# EAGLE board ArduinoRadioV3 (EAGLE 9.5.2)
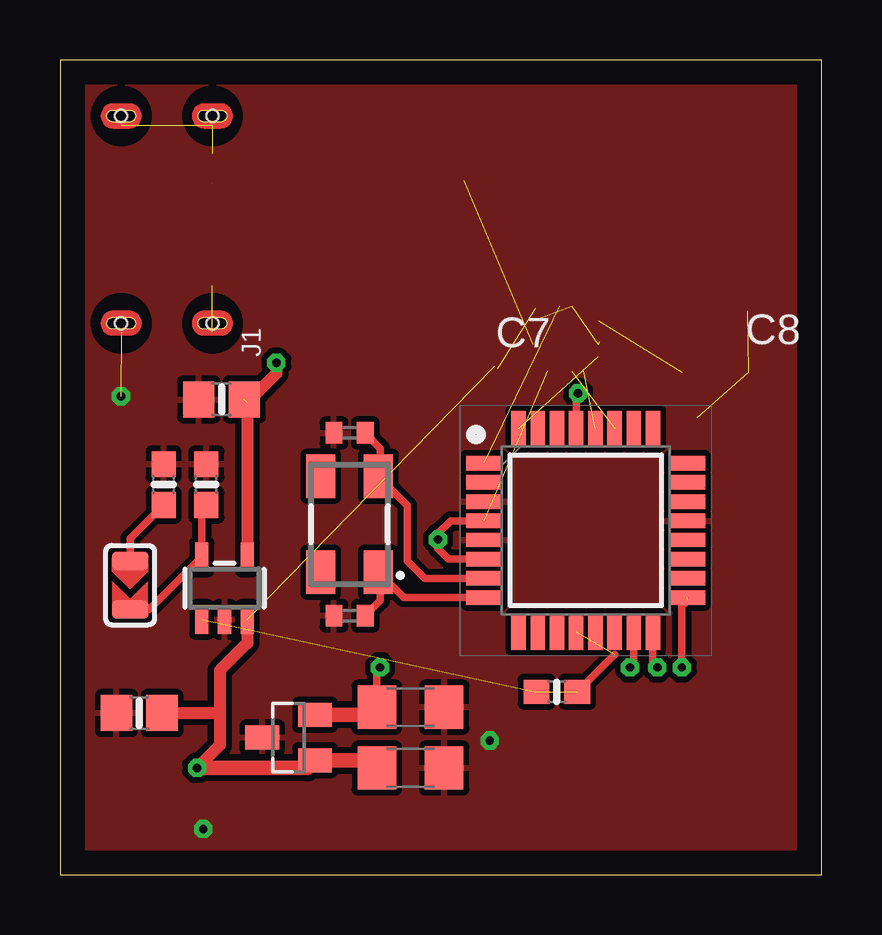
[diagram p0: board, top side]
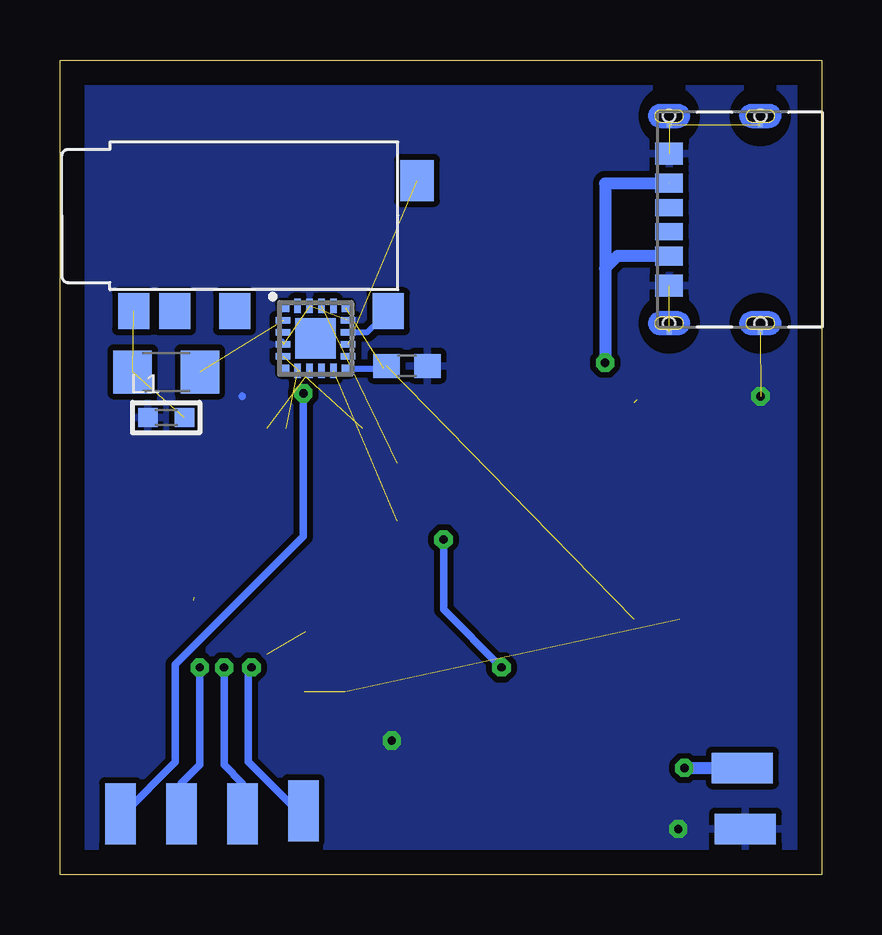
[diagram p1: board, bottom side, seen from below]

Size 31.73 x 33.96 mm. Coordinates in mm from the lower left corner, seen from the top.
Outline: 0,0 31.73,0 31.73,33.96 0,33.96 0,0
Copper layers (1*16): Top 0.035mm / dielectric 1.5mm / Bottom 0.035mm
Design rules "default": minimum track width 6mil, minimum drill 0.35mm, track to track 6mil, track to pad 6mil, pad to pad 6mil, via to via 6mil, smd to smd 6mil, copper to edge 40mil, drill to drill 6mil, minimum pad ring 10mil, minimum via ring 8mil, stop-mask expansion 4mil, vias tented up to drill 0mil, thermal gap 10mil

## Footprints (pad centres in the part's own frame; a part is rotated, then mirrored left to right if it is on the bottom)
C0402 = smd 0.7 x 0.9: 1 -0.65,0; 2 0.65,0
C1206 = smd 1.6 x 1.8: 1 -1.4,0; 2 1.4,0
0805-NO@1 = smd 1.3 x 1.5: 1 -0.95,0; 2 0.95,0
C0603 = smd 1.1 x 1: 1 -0.85,0; 2 0.85,0
QFP80P900X900X120-32N = smd 1.475 x 0.6: 1 -4.238,2.8; 2 -4.238,2; 3 -4.238,1.2; 4 -4.238,0.4; 5 -4.238,-0.4; 6 -4.238,-1.2; 7 -4.238,-2; 8 -4.238,-2.8; 17 4.238,-2.8; 18 4.238,-2; 19 4.238,-1.2; 20 4.238,-0.4; 21 4.238,0.4; 22 4.238,1.2; 23 4.238,2; 24 4.238,2.8 | smd 0.6 x 1.475: 9 -2.8,-4.238; 10 -2,-4.238; 11 -1.2,-4.238; 12 -0.4,-4.238; 13 0.4,-4.238; 14 1.2,-4.238; 15 2,-4.238; 16 2.8,-4.238; 25 2.8,4.238; 26 2,4.238; 27 1.2,4.238; 28 0.4,4.238; 29 -0.4,4.238; 30 -1.2,4.238; 31 -2,4.238; 32 -2.8,4.238
SOT23 = smd 1 x 1.4: 1 -0.95,-1.1; 2 0.95,-1.1; 3 0,1.1
SI4703C19GM = smd 0.34 x 0.34: 1 -1.265,1.265; 6 -1.265,-1.265; 11 1.265,-1.265; 16 1.265,1.265 | smd 0.61 x 0.28: 2 -1.355,0.75; 3 -1.355,0.25; 4 -1.355,-0.25; 5 -1.355,-0.75; 12 1.355,-0.75; 13 1.355,-0.25; 14 1.355,0.25; 15 1.355,0.75 | smd 0.28 x 0.61: 7 -0.75,-1.355; 8 -0.25,-1.355; 9 0.25,-1.355; 10 0.75,-1.355; 17 0.75,1.355; 18 0.25,1.355; 19 -0.25,1.355; 20 -0.75,1.355 | smd 1.7 x 1.7: 21 0,0
CUI_UJC-HP-3-SMT-TR = smd 0.7 x 1.15: A5 -0.5,0; B5 0.5,0 | smd 0.8 x 1.15: A9 1.52,0; B9 -1.52,0 | smd 0.9 x 1.15: A12 2.75,0; B12 -2.75,0 | smd 0.2 x 0.2: S1 -4.695,0; S2 3.945,0; S3 -4.695,-3.8; S4 3.945,-3.8 | hole 0.5: -4.32,0; 4.32,0; -4.32,-3.8; 4.32,-3.8
L0603 = smd 0.8 x 0.8: 1 -0.762,0; 2 0.762,0
SMD1,27-2,54 = smd 1.27 x 2.54: 1 0,0
0603-NO = smd 1.075 x 1: 1 -0.85,0; 2 0.85,0
SOLDERJUMPER_ARROW_NOPASTE = smd 0.762 x 1.524: 1 -1.016,0; 2 1.016,0
SOT23-5 = smd 0.55 x 1.2: 1 -0.95,-1.3; 2 0,-1.3; 3 0.95,-1.3; 4 0.95,1.3; 5 -0.95,1.3
STX-3542-5N-G-TR = smd 1.5 x 1.3: 2 -0.9,0.4; 4 -0.9,6.8; 5 -0.9,9.3; RING -0.9,11 | smd 1.7 x 1.4: 3 4.55,-0.8
ABM3B = smd 1.8 x 1.2: 1 -2,-1.2; 2 2,-1.2; 3 2,1.2; 4 -2,1.2

## Placement (x,y rotation side)
C1  10pF  [C0402]  12.06,18.41 180 top
C2  10pF  [C0402]  12.06,10.79 180 top
C3  47uf  [C1206]  14.61,4.45 0 top
C4  47uF  [C1206]  14.61,6.99 0 top
C5  10µF  [0805-NO@1]  6.73,19.81 180 top
C6  10µF  [0805-NO@1]  3.3,6.73 180 top
C7  22nF  [C0603]  17.27,21.21 0 bottom
C8  100pF  [C1206]  27.3,20.95 0 bottom
IC1  ATMEGA328P-AU  [QFP80P900X900X120-32N]  21.91,14.35 0 top
IC2  LM50  [SOT23]  9.53,5.71 90 top
IC3  SI4703-C19-GM  [SI4703C19GM]  21.08,22.35 0 bottom
J1  UJC-HP-3-SMT-TR  [CUI_UJC-HP-3-SMT-TR]  6.35,27.3 90 bottom
L1  L_0603  [L0603]  27.3,19.05 0 bottom
PAD1  WIREPADSMD1,27-254  [SMD1,27-2,54]  3.3,4.45 90 bottom
PAD2  WIREPADSMD1,27-254  [SMD1,27-2,54]  3.17,1.91 90 bottom
PAD3  [SMD1,27-2,54]  29.21,2.54 0 bottom
PAD4  [SMD1,27-2,54]  26.67,2.54 0 bottom
PAD5  [SMD1,27-2,54]  24.13,2.54 0 bottom
PAD6  [SMD1,27-2,54]  21.59,2.67 0 bottom
R2  470  [0603-NO]  20.7,7.62 0 top
R3  10K\  [0603-NO]  6.1,16.26 90 top
R4  2.2K  [0603-NO]  4.32,16.26 90 top
SJ1  [SOLDERJUMPER_ARROW_NOPASTE]  2.92,12.06 270 top
U1  MCP73831T-2ACI/OT  [SOT23-5]  6.86,11.94 0 top
U$1  STX-3542-5N-G-TR  [STX-3542-5N-G-TR]  17.65,24.38 90 bottom
Y1  ABM3B-8.000MHZ-10-1-U-T  [ABM3B]  12.06,14.61 90 top

## Library data of the parts
C1 C2 = rcl; SPICEPREFIX: C
C3 C4 = better14pin
C5 C6 R2-R4 U1 = microbuilder
C7 C8 = adafruit
IC1 = SamacSys_Parts; DESCRIPTION: MICROCHIP - ATMEGA328P-AU. - MICROCONTROLLER MCU, 8 BIT, ATMEGA, 20MHZ, TQFP-32; HEIGHT: 1.2mm; MANUFACTURER_NAME: Microchip; MANUFACTURER_PART_NUMBER: ATMEGA328P-AU; MOUSER_PART_NUMBER: 556-ATMEGA328P-AU; MOUSER_PRICE-STOCK: https://www.mouser.co.uk/ProductDetail/Microchip-Technology-Atmel/ATMEGA328P-AU?qs=K8BHR703ZXiCmmgp6%2FGNmQ%3D%3D
IC2 = linear
IC3 = SamacSys_Parts; DESCRIPTION: SILICON LABS - SI4703-C19-GM - RF RECEIVER, 108MHZ, -20 TO 85DEG C; HEIGHT: 0.55mm; MANUFACTURER_NAME: Silicon Labs; MANUFACTURER_PART_NUMBER: Si4703-C19-GM; MOUSER_PART_NUMBER: 634-SI4703-C19-GM; MOUSER_PRICE-STOCK: https://www.mouser.co.uk/ProductDetail/Silicon-Labs/SI4703-C19-GM?qs=JiL6vA75y8O1ZAxL45qs%252BQ%3D%3D
J1 = UJC-HP-3-SMT-TR; AVAILABILITY: Unavailable; CUI_PURCHASE_URL: https://www.cuidevices.com/product/interconnect/connectors/usb-connectors/ujc-hp-3-smt-tr?utm_source=snapeda.com&utm_medium=referral&utm_campaign=snapedaBOM; DESCRIPTION: Type C, 3 A, Right Angle, Surface Mount (SMT), Power Only USB Receptacle; DIGIKEY-PURCHASE-URL: https://snapeda.com/shop?store=DigiKey&id=4722774; MF: CUI Devices; MP: UJC-HP-3-SMT-TR; PACKAGE: Package; PRICE: None
L1 = rc-master-smd
PAD1-PAD6 = wirepad
SJ1 = microbuilder; BOM: EXCLUDE
U$1 = STX-3542-5N-G-TR
Y1 = SamacSys_Parts; DESCRIPTION: Abracon 8MHz Crystal +/-10ppm 4-SMD, No Lead 5 x 3 x 1.1mm; HEIGHT: mm; MANUFACTURER_NAME: ABRACON; MANUFACTURER_PART_NUMBER: ABM3B-8.000MHZ-10-1-U-T; MOUSER_PART_NUMBER: 815-ABM3B8MHZ101UT; MOUSER_PRICE-STOCK: https://www.mouser.co.uk/ProductDetail/ABRACON/ABM3B-8000MHZ-10-1-U-T?qs=axzvp2Rdp5%252B1td01iPkwcw%3D%3D

## Nets
3V3: C4.1 IC1.4 IC1.6 IC2.2 IC3.10
5V: C5.1 J1.A9 J1.B9 U1.4
ANT: C8.1 L1.2 U$1.RING
AVCC: IC1.18
GND: C1.2 C2.2 C3.2 C4.2 C5.2 C6.2 C7.2 IC1.3 IC1.5 IC1.21 IC2.3 IC3.4 IC3.15 IC3.19 J1.A12 J1.B12 J1.S1 J1.S2 J1.S3 J1.S4 L1.1 PAD2.1 R3.2 R4.2 U1.2
GPIO2: IC1.1 IC3.18
LOUT: IC3.14 U$1.2
MISO: IC1.16 PAD5.1
MOSI: IC1.15 PAD6.1
N$3: R4.1 SJ1.1
N$4: C8.2 IC3.2
PROG: R3.1 SJ1.2 U1.5
RESET: IC1.29 PAD3.1
ROUT: IC3.13 U$1.3
RST: IC1.32 IC3.5
SCK: IC1.17 PAD4.1
SCLK: IC1.28 IC3.7
SDIO: IC1.27 IC3.8
STAT: IC1.12 R2.1 R2.2 U1.1
VBAT: C3.1 C6.1 C7.1 IC2.1 IC3.11 IC3.16 PAD1.1 U1.3
XTAL1: C1.1 IC1.7 Y1.2
XTAL2: C2.1 IC1.8 Y1.1

## Tracks (layer width: path | path; a pad name or v marks a point on that pad's centre or on a via)
3V3  (via drill 0.35)  (1 unrouted)
  Top 0.305: IC1.6 16.19,13.15 15.75,13.59 v15.75,13.97 15.75,14.22 16.27,14.75 IC1.4 | C4.1 13.21,8.51 v13.34,8.64
  Top 0.61: C4.1 12.88,6.67 IC2.2
  Bottom 0.305: v13.34,8.64 15.75,11.05 v15.75,13.97
5V  (via drill 0.35)  (2 unrouted)
  Top 0.508: C5.1 7.93,19.81 9.02,20.89 v9.02,21.34 | 7.81,19.68 U1.4
  Bottom 0.152: J1.B9
  Bottom 0.508: J1.A9 9.02,28.82 9.02,25.27 | 9.02,25.27 8.5,25.79 J1.B9 | 9.02,25.27 v9.02,21.34
ANT  (2 unrouted)
GND  (via drill 0.35)  (7 unrouted)
  Bottom 0.254: 22.48,22.22 22.48,22.23
  Bottom 0.305: 24.13,19.94
  other vias: 5.97,1.91 17.91,5.59 2.54,19.94
  pour Top (isolate 0.254): 0,33.97 31.75,33.97 31.75,0 0,0
  pour Bottom (isolate 0.254): 0,33.91 31.75,33.91 31.75,0 0,0
GPIO2  (1 unrouted)
LOUT
  Bottom 0.254: U$1.2 18.93,22.6 IC3.14
MISO  (via drill 0.35)
  Top 0.305: IC1.16 24.71,8.82 v24.89,8.64
  Bottom 0.305: v24.89,8.64 24.89,4.57 24.13,3.81 PAD5.1
MOSI  (via drill 0.35)
  Top 0.305: IC1.15 23.91,8.79 v23.75,8.64
  Bottom 0.305: v23.75,8.64 23.88,8.51 23.88,4.7 21.84,2.67 PAD6.1
N$3
  Top 0.305: SJ1.1 2.92,14.01 R4.1
N$4  (1 unrouted)
PROG
  Top 0.305: R3.1 5.91,15.22 U1.5 3.72,11.05 SJ1.2
RESET  (via drill 0.35)
  Top 0.305: IC1.29 21.51,19.98 v21.59,20.07
  Bottom 0.305: v21.59,20.07 21.59,14.1 26.92,8.76 26.92,4.7 29.08,2.54 PAD3.1
ROUT  (1 unrouted)
RST  (1 unrouted)
SCK  (via drill 0.35)  (1 unrouted)
  Top 0.305: 26.16,11.55 IC1.17 | v25.91,8.64 25.91,11.18 26.16,11.43
  Bottom 0.305: PAD4.1 26.67,3.81 25.91,4.57 v25.91,8.64
SCLK  (1 unrouted)
SDIO  (1 unrouted)
STAT  (3 unrouted)
  Top 0.305: R2.2 23.11,9.18
VBAT  (via drill 0.35)  (2 unrouted)
  Top 0.508: U1.3 7.81,9.65 6.67,8.51 6.67,6.73 | C6.1 6.67,6.73 | v5.71,4.45 6.67,5.39 6.67,6.73
  Top 0.61: C3.1 12.88,4.76 IC2.1 10.3,4.45 v5.71,4.45
  Bottom 0.254: C7.1 18.24,21.09 IC3.11
  Bottom 0.508: v5.71,4.45 PAD1.1
XTAL1
  Top 0.305: Y1.2 13.35,16.52 | 13.35,16.52 14.48,15.39 14.48,13.08 15.21,12.35 IC1.7 | C1.1 13.35,17.77 13.35,16.52
XTAL2
  Top 0.305: IC1.8 14.32,11.55 Y1.1 13.34,12.54 13.34,11.43 12.71,10.81 C2.1